# Altium PCB PCB1.PcbDoc
Units mil, origin at the board's own origin, x right, y up, seen from the top; angles counter-clockwise.
Board outline 1645 x 1580 mil, 2 copper layers (Top Layer, Bottom Layer); 15 components, 10 nets, 87 pads, 18 vias.
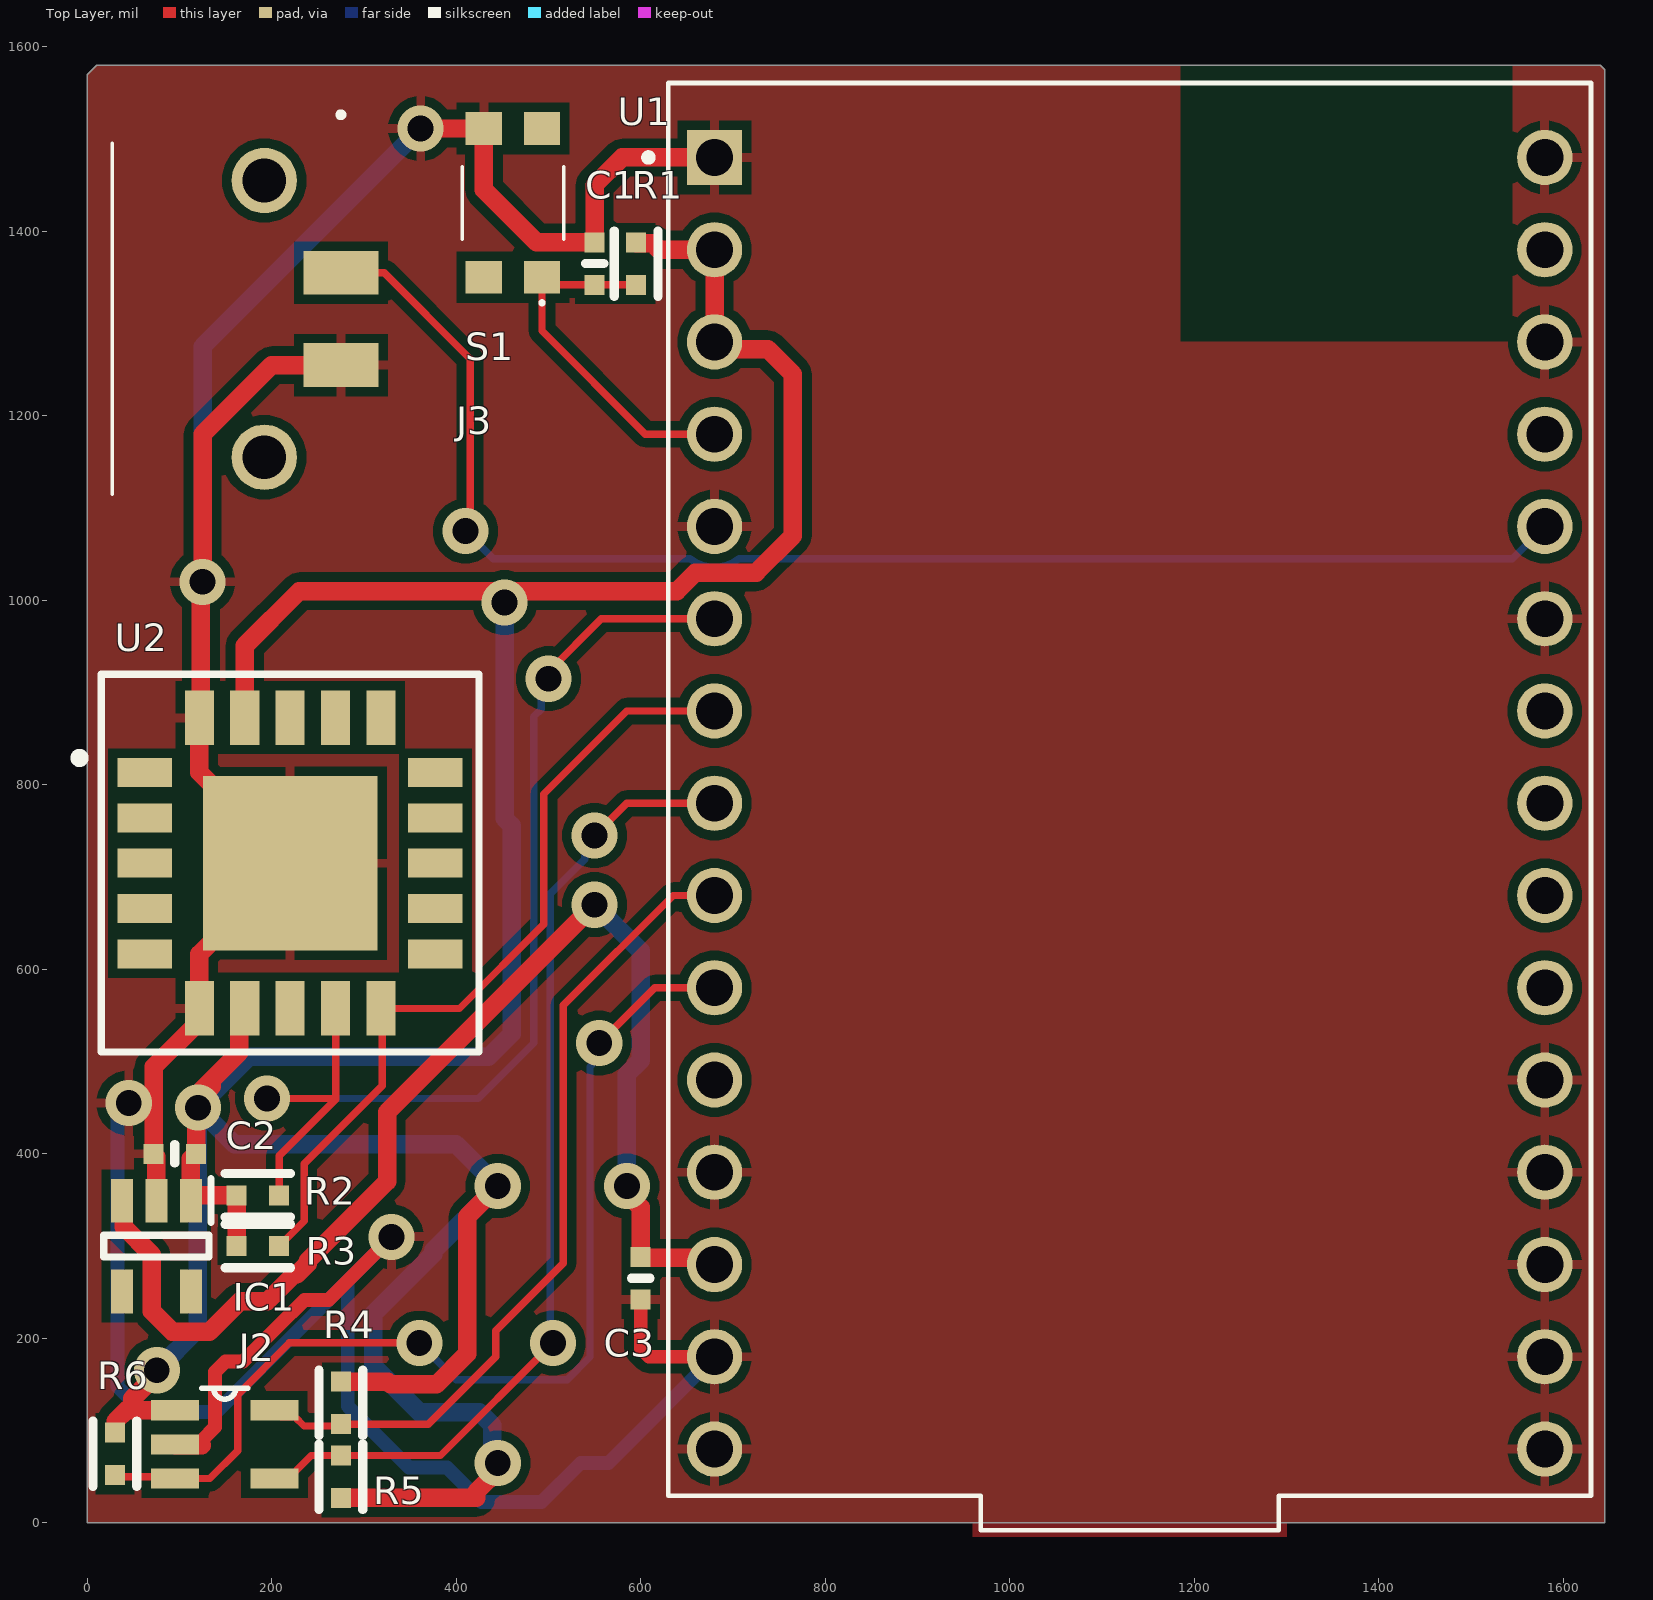
[diagram p0: Top Layer view]
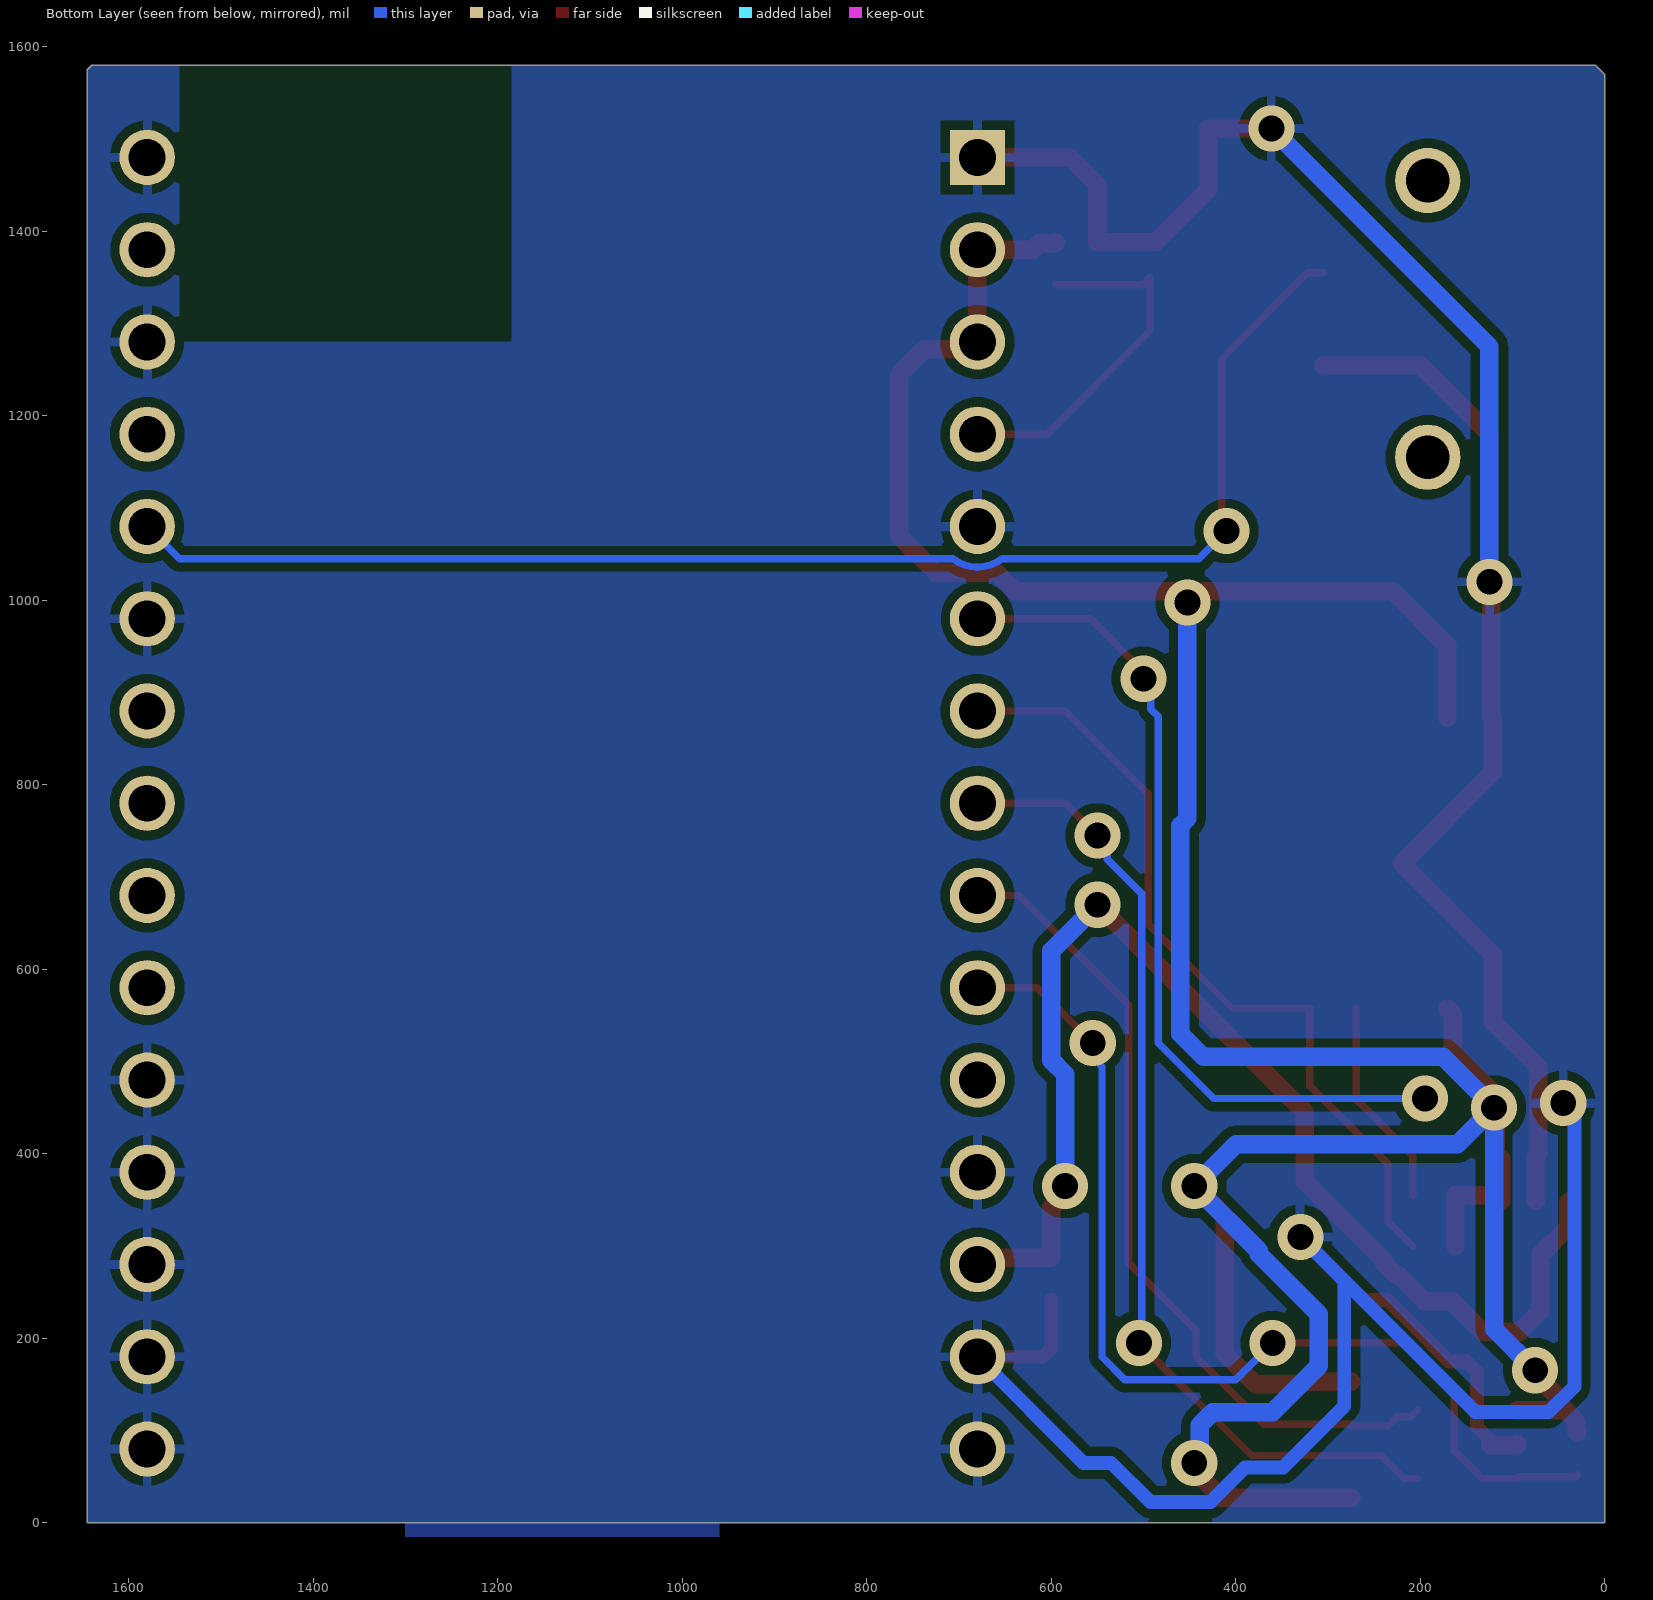
[diagram p1: Bottom Layer view, seen from below]
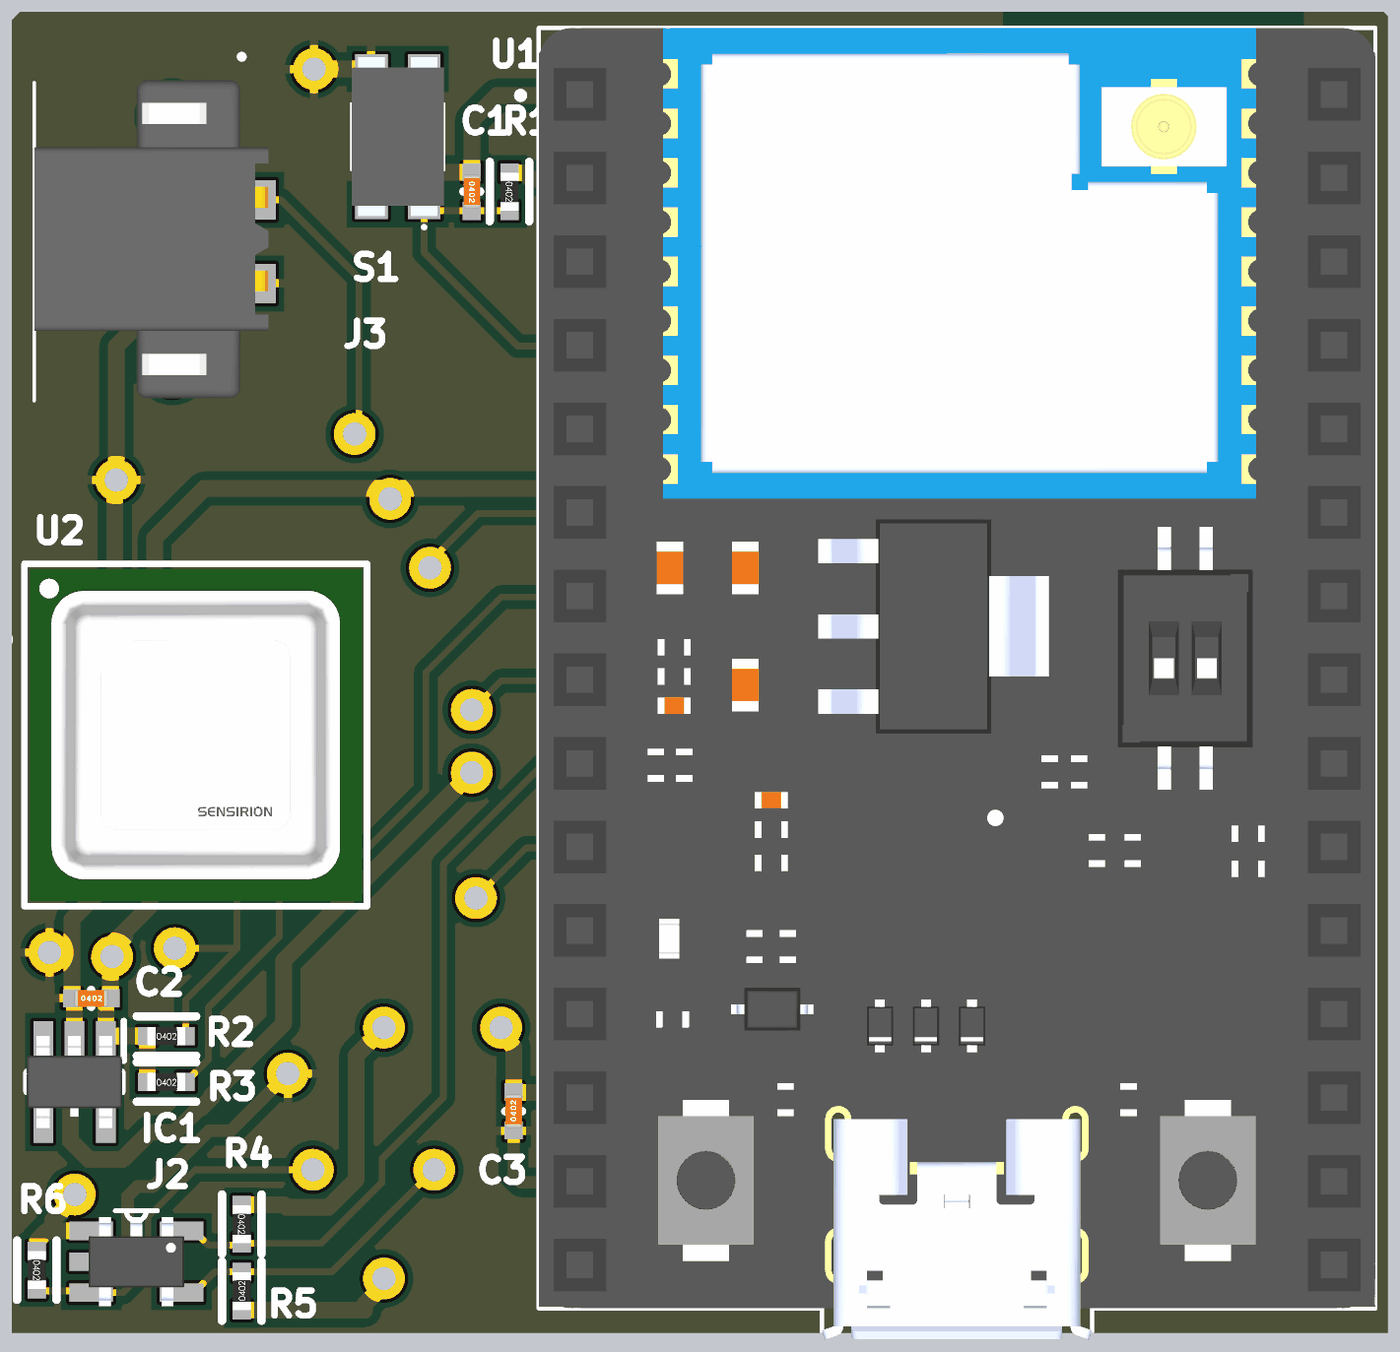
[diagram p2: 3D render of the assembled board from above, using the file's embedded part models]

## Layer stack, top to bottom
Top Solder: solder mask 0.4, Solder Resist, Dk 3.5
Top Layer: signal copper 1.4
Dielectric 1: dielectric 12.6, FR-4, Dk 4.8
Bottom Layer: signal copper 1.4
Bottom Solder: solder mask 0.4, Solder Resist, Dk 3.5

## Board outline
0,0 0,1570 10,1580 1640,1580 1645,1575 1645,0

## Design rules (kind name [scope] priority, off if disabled: settings)
Clearance [All] p1: gap=10 ignorepadtopadclearanceinfootprint=TRUE except(0: Arc-Hole Track-Hole SMDPad-Hole THPad-Hole Via-Hole Fill-Hole Poly-Hole Region-Hole Text-Hole)
PolygonConnect [All] p1: connectstyle=Relief reliefconductorwidth=10 reliefentries=4 polygonreliefangle="90 Angle" airgapwidth=10
RoutingVias [All] p1: holewidth=200 width=200 viastyle="Through Hole" minholewidth=28 minwidth=50 maxholewidth=28 maxwidth=50
SolderMaskExpansion [All] p1: expansion=4 istentingtop=FALSE
Width [All] p1: maxlimit=100 minlimit=6 preferedwidth=10 minimp=50.000000 maximp=50.000000 favimp=50.000000
30 further rules are at their usual default settings.

## Components (designator, comment, footprint, x,y, rotation, side; value= is the part's Value field where it differs from the comment)
C1 "0.10µF" SMD-0402C 550,1365 r180 top
C2 "1µF" SMD-0402C 95,400 r270 top
C3 "0.10µF" SMD-0402C 600,265 r0 top
IC1 "TLV70133DBVRM3" SOT95P280X145-5N 75,300 r270 top
J2 "MCP9800A0T-M/OT" SOT95P270X145-5N 149,85 r0 top
J3 "1821698" 1821698 275,1305 r270 top
R1 "10k" SMD-0402-RES 595,1365 r180 top
R2 "10k" SMD-0402-RES 185,355 r270 top
R3 "10k" SMD-0402-RES 185,300 r270 top
R4 "10k" SMD-0402-RES 275,130 r180 top
R5 "10k" SMD-0402-RES 275,50 r0 top
R6 "10k" SMD-0402-RES 30,75 r180 top
S1 "KMR241NGLFS" KMR241NGLFS 461.5,1430.71 r90 top
U1 "ESP8266-DEVKITC-02U-F" MODULE_ESP8266-DEVKITC-02U-F 1130,794.96 r0 top
U2 "SCD40-D-R2" FP-SCD40-D-R2-MFG 220,715 r0 top

## Footprints (in the part's own frame and the unit in brackets; to place one, negate y for a bottom-side part, rotate by r counter-clockwise, add the part's x,y. Pads: shape width x height; smd on the part's side, far side on the other; paste and mask are expansions set on the pad)
1821698 [mm]
  rect 1.2x2.06 smd: 1(-1.27,0) 2(1.27,0)
  round 1.8 hole 1.2: 3(-3.81,-2.11) 4(3.81,-2.11)
  silkscreen extent -5.67,-6.3 4.83,0.05, body extent -4.91,-6.29 4.76,0.81, height 4.85
FP-SCD40-D-R2-MFG [mm]
  rect 1.5x0.8 smd paste-1000 mask-1000: 1(-4,2.5) 2(-4,1.25) 3(-4,0) 4(-4,-1.25) 5(-4,-2.5) 11(4,-2.5) 12(4,-1.25) 13(4,0) 14(4,1.25) 15(4,2.5)
  rect 0.8x1.5 smd paste-1000 mask-1000: 6(-2.5,-4) 7(-1.25,-4) 8(0,-4) 9(1.25,-4) 10(2.5,-4) 16(2.5,4) 17(1.25,4) 18(0,4) 19(-1.25,4) 20(-2.5,4)
  rect 4.8x4.8 smd paste-1000 mask-1000: 21(0,0)
  silkscreen extent -5.92,-5.2 5.2,5.2, body extent -5.3,-5.3 5.3,5.3, height 0.25
KMR241NGLFS [mm]
  rect 0.9x1 smd: 1(-2.05,-0.8) 2(2.05,-0.8) 3(2.05,0.8) 4(-2.05,0.8)
  silkscreen extent -2.8,-1.4 1,1.4, body extent -2.41,-1.4 2.41,1.4, height 2
MODULE_ESP8266-DEVKITC-02U-F [mil]
  rect 60x60 hole 40: J2_1(-450,685.04)
  round 60 hole 40: J2_2(-450,585.04) J2_3(-450,485.04) J2_4(-450,385.04) J2_5(-450,285.04) J2_6(-450,185.04) J2_7(-450,85.04) J2_8(-450,-14.96) J2_9(-450,-114.96) J2_10(-450,-214.96) J2_11(-450,-314.96) J2_12(-450,-414.96) J2_13(-450,-514.96) J2_14(-450,-614.96) J2_15(-450,-714.96) J3_1(450,685.04) J3_2(450,585.04) J3_3(450,485.04) J3_4(450,385.04) J3_5(450,285.04) J3_6(450,185.04) J3_7(450,85.04) J3_8(450,-14.96) J3_9(450,-114.96) J3_10(450,-214.96) J3_11(450,-314.96) J3_12(450,-414.96) J3_13(450,-514.96) J3_14(450,-614.96) J3_15(450,-714.96)
  silkscreen extent -526,-803 500,766, body extent -500,-803 500,766, height 398
SMD-0402-RES [mm]
  rect 0.55x0.55 smd: 1(0,0.584) 2(0,-0.584)
  silkscreen extent -0.6,-0.9 0.6,0.9, body extent -0.28,-0.57 0.27,0.58, height 0.41
SMD-0402C [mm]
  rect 0.55x0.55 smd: 1(0,0.584) 2(0,-0.584)
  silkscreen extent -0.25,0 0.25,0, body extent -0.25,-0.51 0.25,0.51, height 0.51
SOT95P270X145-5N [mil]
  rect 52x22 smd: 1(-54,37) 2(-54,0) 3(-54,-37) 4(54,-37) 5(54,37)
  silkscreen extent -25,49 25,61, body extent -57,-53 57,53, height 57
SOT95P280X145-5N [mm]
  rect 1.2x0.6 smd: 1(-1.25,0.95) 2(-1.25,0) 3(-1.25,-0.95) 4(1.25,-0.95) 5(1.25,0.95)
  silkscreen extent -1.85,-1.45 0.3,1.5, body extent -1.4,-1.45 1.4,1.45, height 1.2

## Part data
C1 C3: library part GCM155R71C104KA55D, "CAP CER 0.1UF 16V X7R 0402", Digi-Key Part Number=490-4759-1-ND, Manufacturer="Murata Electronics North America", Operating Temperature="-55°C ~ 125°C", Package / Case="0402 (1005 Metric)", Ratings=AEC-Q200, Temperature Coefficient=X7R, Tolerance=±10%, Voltage=16V, @ qty=0, Applications=Automotive, Datasheets=http://www.murata.com/~/media/webrenewal/support/library/catalog/products/capacitor/mlcc/c03e.ashx, Factory Stock=0, Features=-, Height - Seated (Max)=-, Image=//media.digikey.com/Renders/Murata%20Renders/ZRB-SERIES-0402.jpg, Lead Spacing=-, Lead Style=-, Minimum Quantity=1, Mounting Type="Surface Mount, MLCC", Packaging="Cut Tape (CT)", Part Number=GCM155R71C104KA55D, Part Status=Active, Quantity Available=734194, Series=GCM, Size / Dimension="0.039\" L x 0.020\" W (1.00mm x 0.50mm)", Thickness (Max)="0.022\" (0.55mm)", Unit Price (USD)=0.1
C2: library part GRM155C81C105KE11D, "CAP CER 1UF 16V X6S 0402", Digi-Key Part Number=490-12700-1-ND, Manufacturer="Murata Electronics North America", Operating Temperature="-55°C ~ 105°C", Package / Case="0402 (1005 Metric)", Ratings=-, Temperature Coefficient=X6S, Tolerance=±10%, Voltage=16V, @ qty=0, Applications="General Purpose", Datasheets=http://www.murata.com/~/media/webrenewal/support/library/catalog/products/capacitor/mlcc/c02e.pdf, Factory Stock=0, Features=-, Height - Seated (Max)=-, Image=//media.digikey.com/Renders/Murata%20Renders/ZRB-SERIES-0402.jpg, Lead Spacing=-, Lead Style=-, Minimum Quantity=1, Mounting Type="Surface Mount, MLCC", Packaging="Cut Tape (CT)", Part Number=GRM155C81C105KE11D, Part Status=Active, Quantity Available=37242, Series=GRM, Size / Dimension="0.039\" L x 0.020\" W (1.00mm x 0.50mm)", Thickness (Max)="0.024\" (0.60mm)", Unit Price (USD)=0.29
IC1: "Integrated Circuit", Manufacturer_Name="Texas Instruments", Mouser Part Number=595-TLV70133DBVRM3, Datasheet Link=https://www.ti.com/lit/ds/symlink/tlv701.pdf?ts=1700390898470&ref_url=https%253A%252F%252Fwww.ti.com%252Fsitesearch%252Fen-us%252Fdocs%252Funiversalsearch.tsp%253FlangPref%253Den-US%2526searchTerm%253DTLV70133DBVRM3%2526nr%253D3, Height=1.45mm, Manufacturer_Part_Number=TLV70133DBVRM3, Mouser Price/Stock=https://www.mouser.co.uk/ProductDetail/Texas-Instruments/TLV70133DBVRM3?qs=3Rah4i%252BhyCHU3ffU4PTMcA%3D%3D
J2 U1: Package=None, Availability=Unavailable, Price=None
  J2: MF="{'manufacturer': u'Microchip Technology'}", MP=MCP9800A0T-M/OT
  U1: MF="{'manufacturer': u'Espressif Systems'}", MP=ESP8266-DEVKITC-02U-F
J3: "Connector", Manufacturer_Name="Phoenix Contact", Mouser Part Number=651-1821698, Arrow Part Number=1821698, Arrow Price/Stock=https://www.arrow.com/en/products/1821698/phoenix-contact, Datasheet Link=http://www.phoenixcontact.com/gb/produkte/1821698, Height=4.95mm, Manufacturer_Part_Number=1821698, Mouser Price/Stock=https://www.mouser.co.uk/ProductDetail/Phoenix-Contact/1821698?qs=2WS7V4AoKFr7rSFtXkjbWA%3D%3D
R1 R2 R3 R4 R5 R6: library part ERJ-2GEJ103X, "RES SMD 10K OHM 5% 1/10W 0402", Digi-Key Part Number=P10KJCT-ND, Manufacturer="Panasonic Electronic Components", Operating Temperature="-55°C ~ 155°C", Package / Case="0402 (1005 Metric)", Power (Watts)="0.1W, 1/10W", Supplier Device Package=0402, Temperature Coefficient=±200ppm/°C, Tolerance=±5%, @ qty=1500, Composition="Thick Film", Datasheets=http://industrial.panasonic.com/www-cgi/jvcr13pz.cgi?E+PZ+3+AOA0001+ERJ2GEJ103X+7+WW, Factory Stock=0, Failure Rate=-, Features="Automotive AEC-Q200", Height - Seated (Max)="0.016\" (0.40mm)", Image=//media.digikey.com/Photos/Panasonic%20Photos/ERJ-PA2-Series.jpg, Minimum Quantity=1, Number of Terminations=2, Packaging="Cut Tape (CT)", Part Number=ERJ-2GEJ103X, Part Status=Active, Quantity Available=2560215, Series=ERJ, Size / Dimension="0.039\" L x 0.020\" W (1.00mm x 0.50mm)", Unit Price (USD)=0.00350
S1: "Switch", Manufacturer_Name="C & K COMPONENTS", Mouser Part Number=611-KMR241NGLFS, Arrow Part Number=KMR241NGLFS, Arrow Price/Stock=https://www.arrow.com/en/products/kmr241nglfs/ck, Datasheet Link=https://www.ckswitches.com/media/1479/kmr2.pdf, Height=1.9mm, Manufacturer_Part_Number=KMR241NGLFS, Mouser Price/Stock=https://www.mouser.co.uk/ProductDetail/CK/KMR241NGLFS?qs=sb%252But3Lm4x3MOq2auuFbeg%3D%3D
U2: library part CMP-144026-000006-1, "CO2 SENSOR 50 PPM I2C SMD"

## Via types
v1: diameter 50, hole 28, Top Layer to Bottom Layer, 18 vias

## Nets (pads, with @x,y where several pads share a name; then routed paths per layer and width w, separated by ;. In a path a pad name is that pad's centre, name@x,y a point inside that pad or via, vN(x,y) a via of type N, cw(c..) or ccw(c..) an arc to the next point about the centre after c; other vN are vias at no path point)
3V3: C2.1 IC1.1 J2.1 R1.2 R2.2 R3.2 R4.2 R5.2 R6.2 U1.J2_2 U1.J2_3 U2.7 U2.19 | length 4207.9
  Top Layer w20: R6.2 30.83,98.83 30.83,110.28 42.54,122 55,122 ; v1(75.44,165.44) 75.44,161.1 48.77,134.43 48.77,128.23 55,122 ; J2.1 55,122 ; IC1.1 IC1.1@112.4,353.19 ; v1(120,450) 120,458.12 135,473.12 135,480 ; R3.2 R2.2 114.21,355 IC1.1@112.4,353.19 ; U2.7 165.04,551.77 165.04,510.04 135,480 ; U2.19 170.79,950.79 230,1010 v1@455,1010 ; R5.2 422,27 422,33.88 445,56.88 v1(445,65) ; R4.2 325.73,153 328.73,150 378.64,150 411.82,183.18 411.82,331.82 v1(445,365) ; v1(452.42,997.42) 455,1000 v1@455,1010 ; R1.2 595.83,1387.17 612.83,1387.17 620,1380 U1.J2_2 U1.J2_3 687.65,1272.35 737.65,1272.35 765,1245 765,1070 725,1030 659.29,1030 639.29,1010 v1@455,1010 ; IC1.1@112.4,353.19 112.4,394.4 C2.1 118,463 135,480
  Bottom Layer w20: v1(75.44,165.44) 120,210 v1(120,450) ; v1@443.61,363.61 375,295 375,291.36 310,226.36 310,170 360,120 425,120 439.26,105.74 439.26,70.74 v1(445,65) ; v1(445,365) 399.63,410.37 159.63,410.37 v1(120,450) ; v1(452.42,997.42) 452.42,763.44 460,755.86 460,530 435,505 175,505 v1(120,450)
+5: C3.1 IC1.3 U1.J2_13 | length 1358.2
  Top Layer w20: IC1.3 39.41,347.4 39.41,321.09 70,290.5 70,229.47 92.31,207.17 132.5,207.17 165.33,240 195,240 224.17,269.17 227.11,269.17 238.83,280.89 238.83,283.83 325,370 325,445 v1(550,670) ; v1(585,365) 585,356.88 600,341.88 C3.1 600.83,287.17 672.83,287.17 U1.J2_13
  Bottom Layer w20: v1(550,670) 600,620 600,501.36 585,486.36 v1(585,365)
ALERT: J2.3 R6.1 U1.J2_10 | length 1134.2
  Top Layer w8: R6.1 32,50 93,50 J2.3 133,48 163,78 163,138.8 219.2,195 v1(360,195) ; v1(555,520) 615,580 U1.J2_10
  Bottom Layer w8: v1(360,195) 400,155 520.15,155 545,179.85 545,494.31 546.96,496.28 546.96,511.96 v1(555,520)
EN: C1.1 R1.1 S1.1 U1.J2_4 | length 396.7
  Top Layer w8: R1.1 C1.1 500.99,1342 S1.1 492.99,1292.01 605,1180 U1.J2_4
GND: C1.2 C2.2 C3.2 IC1.2 J2.2 J3.2 S1.3 U1.J2_1 U1.J2_5 U1.J2_12 U1.J2_14 U1.J2_15 U1.J3_1 U1.J3_3 U1.J3_6 U1.J3_11 U1.J3_12 U1.J3_13 U1.J3_14 U1.J3_15 U2.6 U2.20 U2.21 | length 4091.5
  Top Layer w15: v1(45,455) 72,455 ; 124.28,84 124.28,89.54 138.5,103.75 138.5,163.5 150,175 168.8,175 206.3,212.5 206.39,212.5 235.56,241.67 261.67,241.67 v1(330,310) ; C3.2 600,188.79 608.79,180 U1.J2_14
  Top Layer w20: IC1.2 75,397 C2.2 72,455 72,494.17 121.57,543.74 U2.6 121.57,616.57 U2.21 121.57,813.43 U2.20 123.29,874.19 123.29,1018.29 v1(125,1020) 125,1180 200,1255 J3.2@305,1255 ; J2.2 96,84 124.28,84 ; v1(361.42,1511.42) S1.3 430,1445 487,1388 C1.2 550,1450 580,1480 U1.J2_1
  Bottom Layer w15: v1(45,455) 32.94,442.94 32.94,147.84 60.78,120 140,120 282.5,262.5 ; v1(330,310) 282.5,262.5 ; U1.J2_14 565,65 535,65 492.5,22.5 427.4,22.5 402.5,47.4 402.5,47.5 390,60 348.79,60 282.5,126.29 282.5,262.5
  Bottom Layer w20: v1(125,1020) 125,1275 v1(361.42,1511.42)
SCL: R2.1 U1.J2_6 U2.9 | length 1229.3
  Top Layer w8: v1(195,460) 268.43,460 269.21,459.21 ; R2.1 208,398 269.21,459.21 ; U2.9 269.21,459.21 ; v1(500,915) 500,922.67 557.33,980 U1.J2_6
  Bottom Layer w8: v1(195,460) 423.94,460 484,520.06 484,874 491.96,881.96 491.96,906.96 v1(500,915)
SCLK1: J2.4 R5.1 U1.J2_8 | length 1078.5
  Top Layer w8: J2.4 218,48 243,73 R5.1 383,73 v1(505,195) ; v1(550,745) 585,780 U1.J2_8
  Bottom Layer w8: v1(505,195) 502,198 502,682 539.34,719.34 539.34,722.97 550,733.63 v1(550,745)
SDA: R3.1 U1.J2_7 U2.10 | length 882.3
  Top Layer w8: R3.1 235.23,327.23 235.23,389.17 320,473.94 320,555.94 U2.10 403.58,557.52 495,648.94 495,790 585,880 U1.J2_7
SDA1: J2.5 R4.1 U1.J2_9 | length 902.3
  Top Layer w8: J2.5 210,115 225,115 235,105 273,105 R4.1 369.58,107 442.79,180.21 442.79,208.25 516,281.46 516,560.85 635.15,680 U1.J2_9
"SOIL SENSOR": J3.1 U1.J3_5 | length 1538.4
  Top Layer w8: J3.1@305,1355 321.93,1355 415,1261.93 415,1080 v1(410,1075)
  Bottom Layer w8: v1(410,1075) 440,1045 653.34,1045 ccw(c680,1080) 706.66,1045 1545,1045 U1.J3_5
pads on no net: IC1.4 IC1.5 J3.3 J3.4 S1.2 S1.4 U1.J2_11 U1.J3_2 U1.J3_4 U1.J3_7 U1.J3_8 U1.J3_9 U1.J3_10 U2.1 U2.2 U2.3 U2.4 U2.5 U2.8 U2.11 U2.12 U2.13 U2.14 U2.15 U2.16 U2.17 U2.18

## Polygon pours and split planes (outlines as drawn)
GND on Top Layer "GND_L01_P000" (solid, pour order 0): 10,1580 1185,1580 1185,1280 1545,1280 1545,1580 1640,1580 1645,1575 1645,0 1300,0 1300,-15 960,-15 960,0 0,0 0,1570
GND on Bottom Layer "GND_L02_P001" (solid, pour order 1): 10,1580 1185,1580 1185,1280 1545,1280 1545,1580 1640,1580 1645,1575 1645,0 1300,0 1300,-15 960,-15 960,0 0,0 0,1570

## Silkscreen, mask and mechanical layers (free items; w line width, h text height)
Mechanical 1:
  the board outline again, w30